# Altium PCB 智能插座2019_1_7.PcbDoc
Units mil, origin at the board's own origin, x right, y up, seen from the top; angles counter-clockwise.
Board outline 3149.61 x 3089.41 mil, 2 copper layers (Top Layer, Bottom Layer); 84 components, 61 nets, 276 pads, 96 vias.
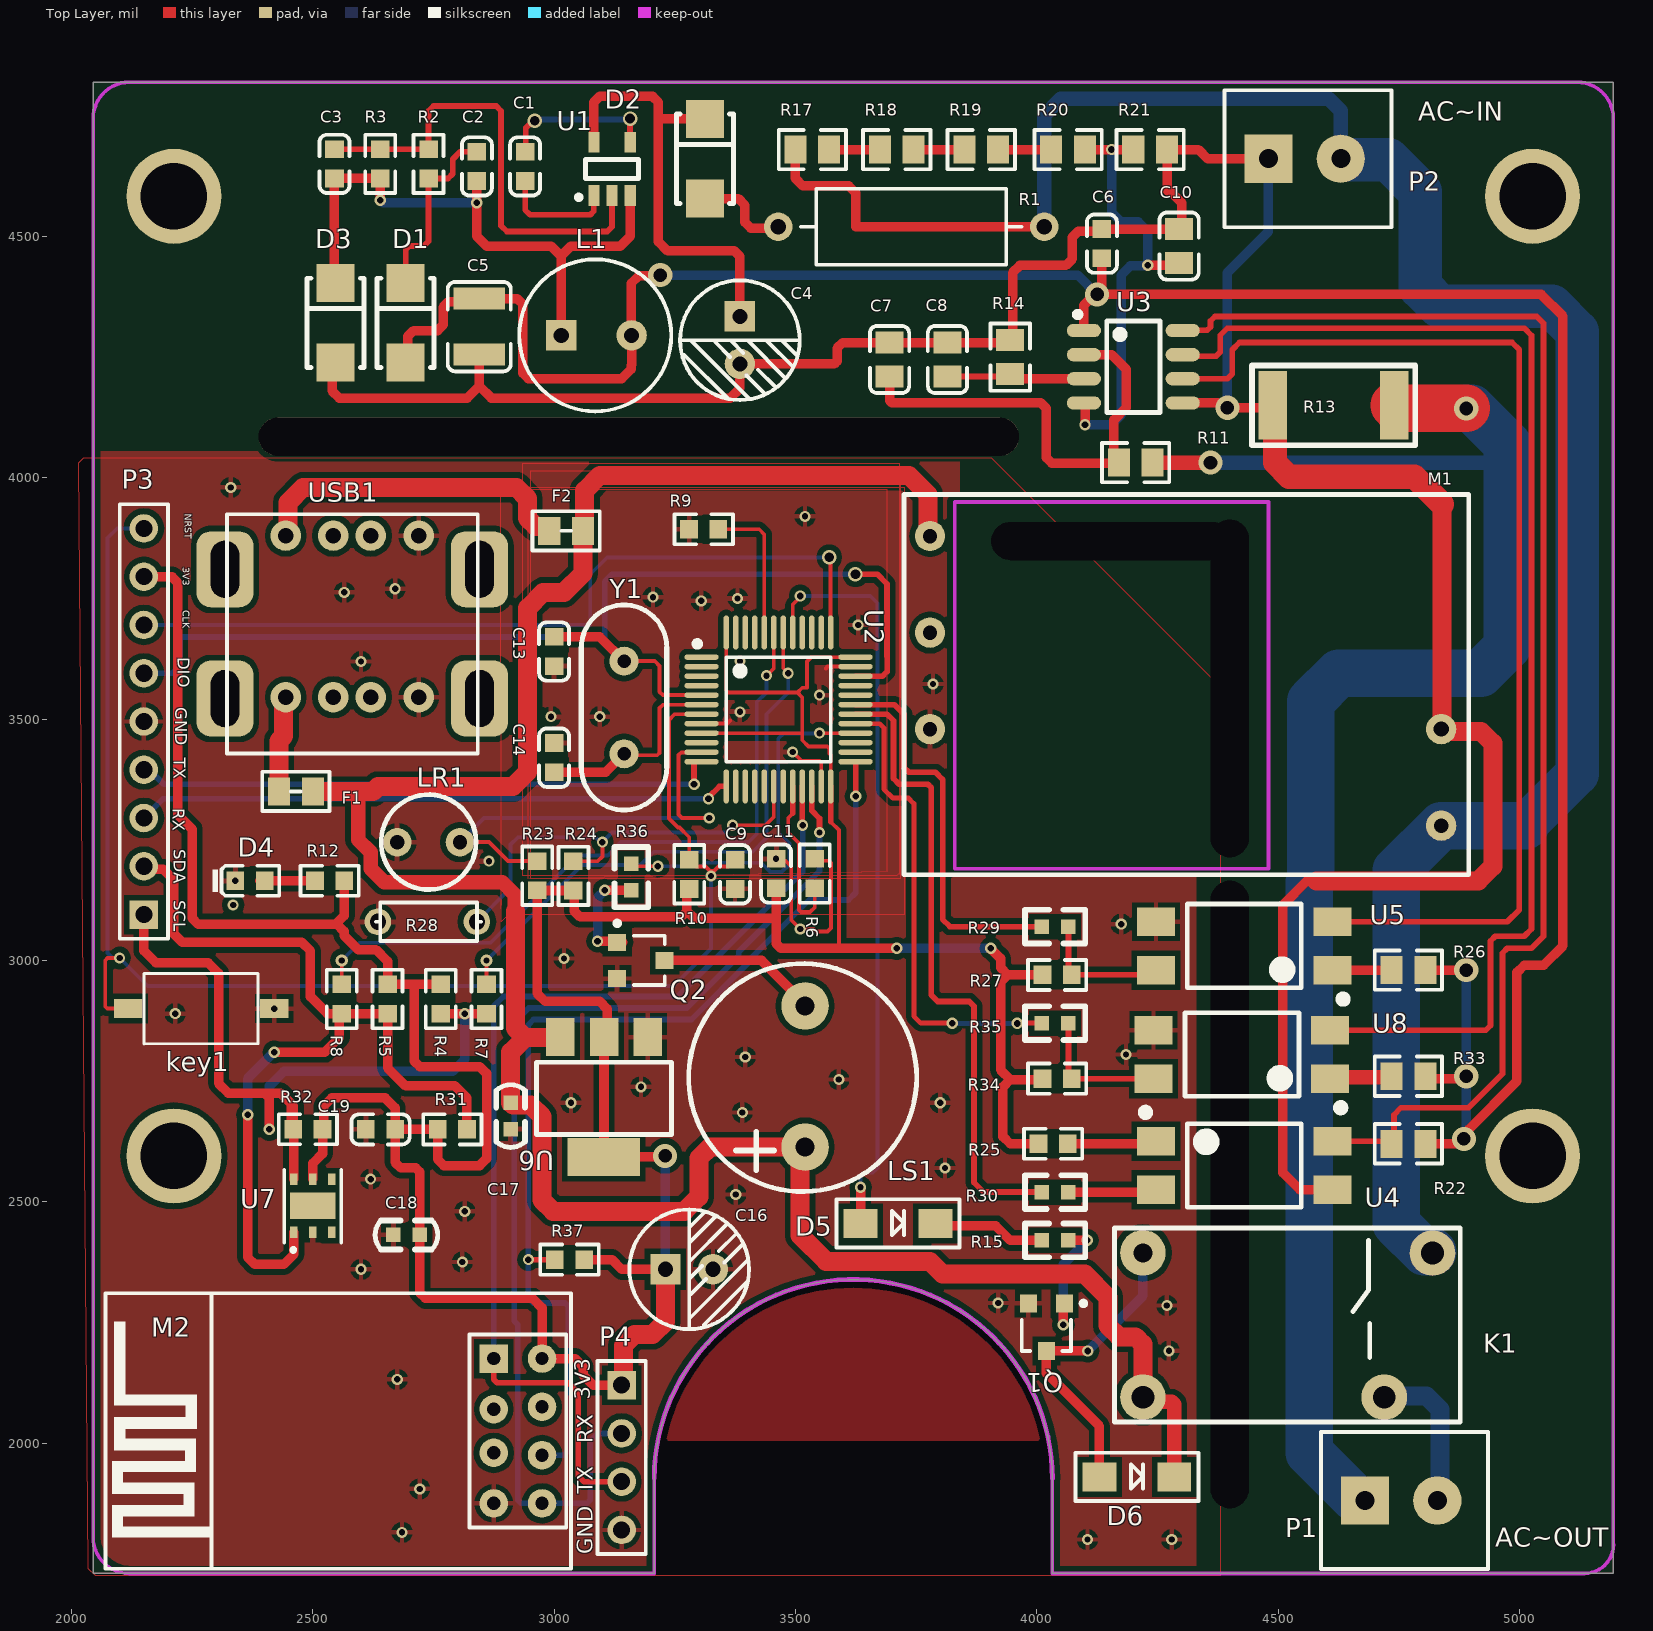
[diagram p0: Top Layer view]
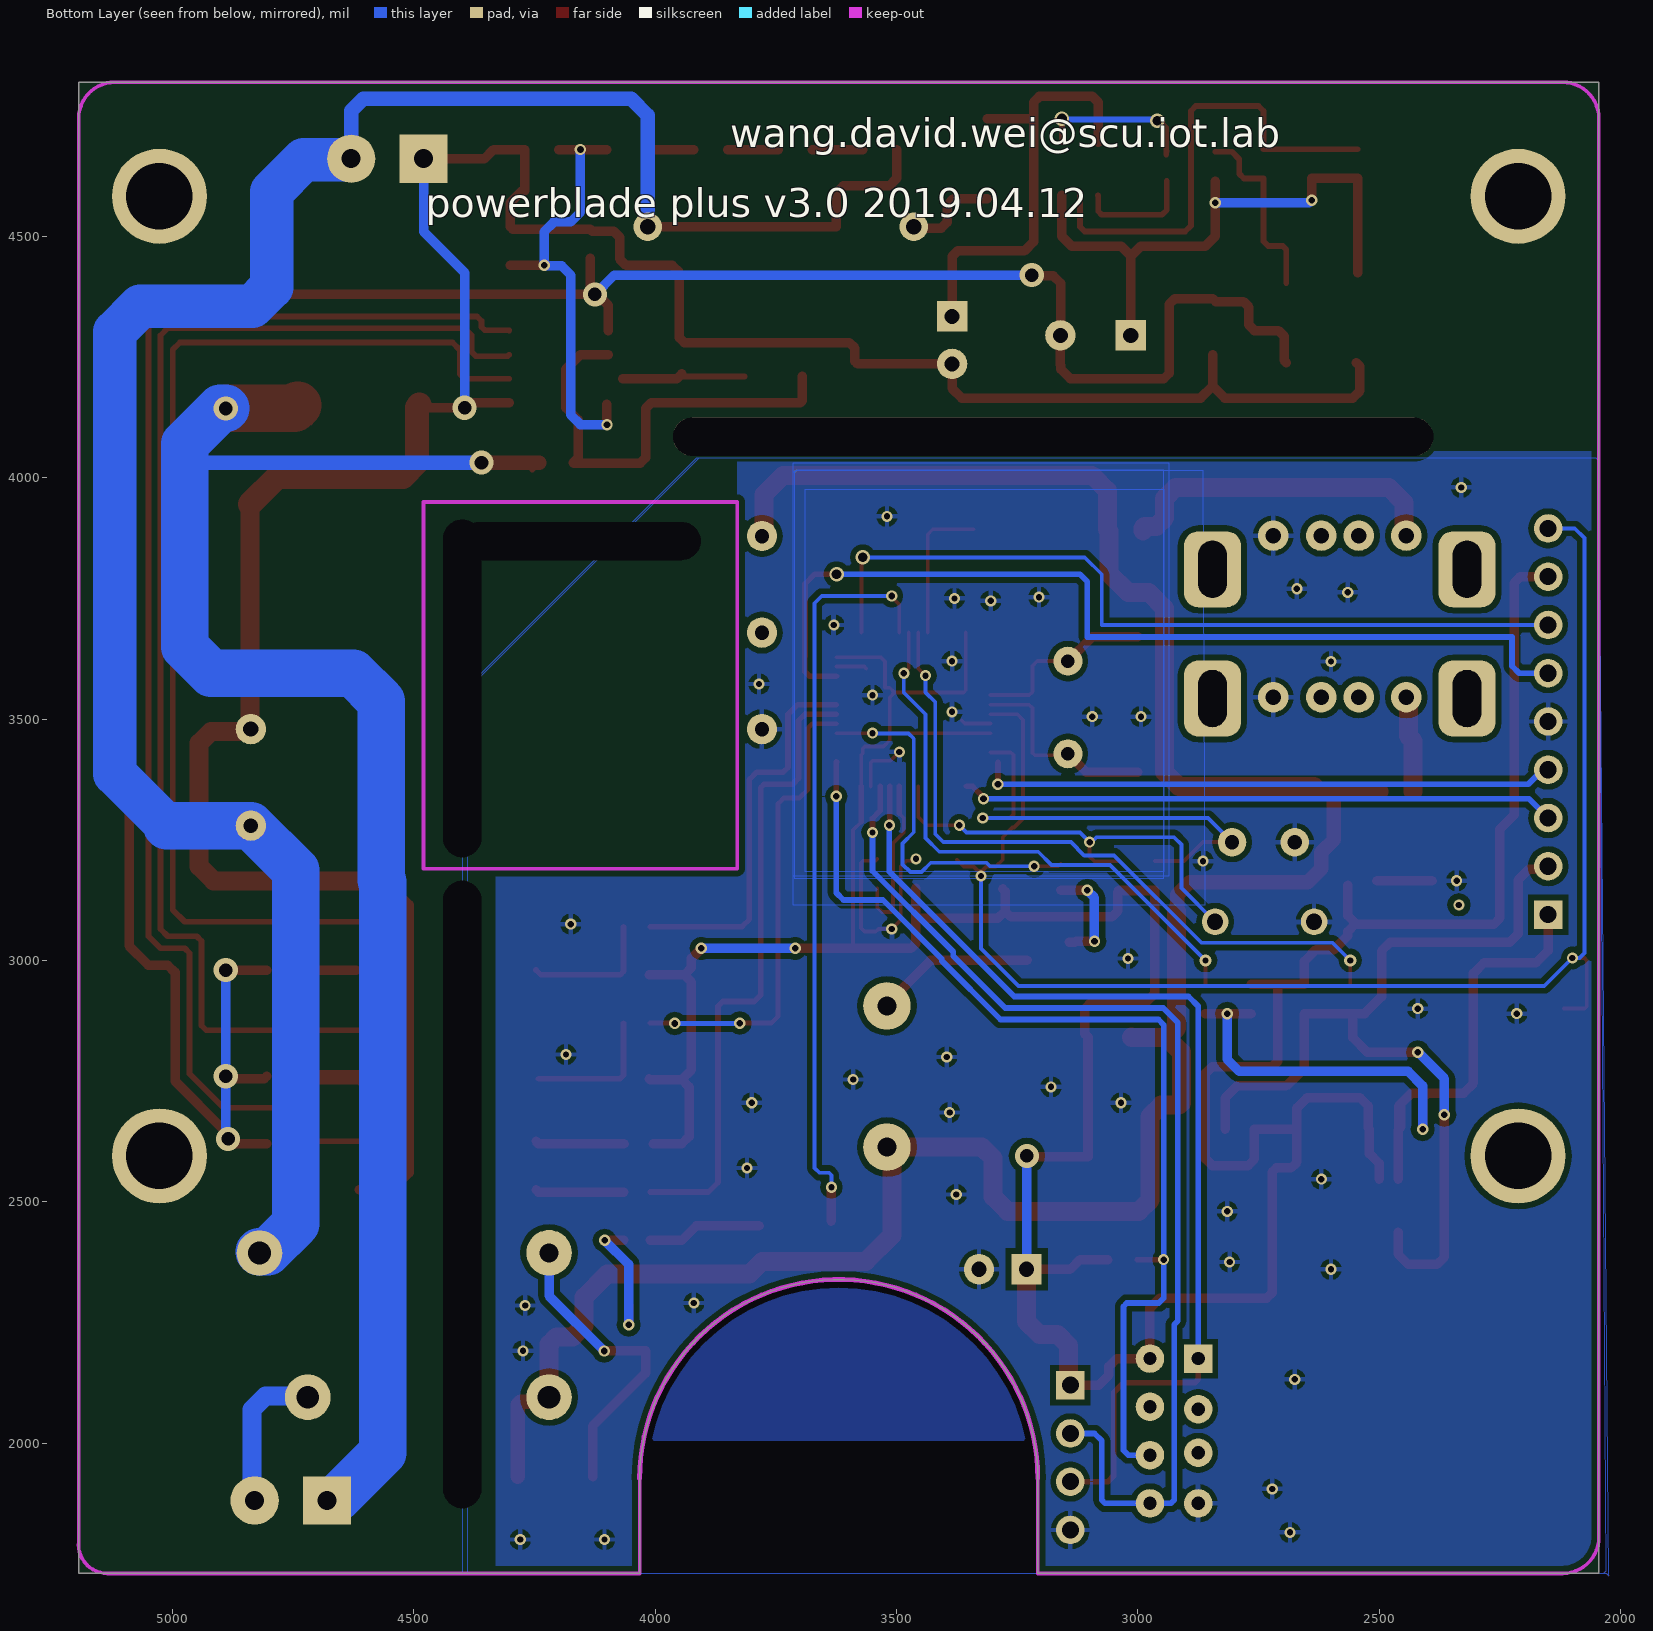
[diagram p1: Bottom Layer view, seen from below]

## Layer stack, top to bottom
Top Solder: solder mask 0.4, Solder Resist, Dk 3.5
Top Layer: signal copper 1.4
Dielectric1: dielectric 12.6, FR-4, Dk 4.8
Bottom Layer: signal copper 1.4
Bottom Solder: solder mask 0.4, Solder Resist, Dk 3.5

## Board outline
2045,1730 2045,4819.41 5194.61,4819.41 5194.61,1730 4032.32,1730 4032.32,1925.71 ccw(c3619.84,1926.42) 3207.36,1925.71 3207.36,1730.04 3207.32,1730

## Design rules (kind name [scope] priority, off if disabled: settings)
Clearance [All] p1: gap=8 ignorepadtopadclearanceinfootprint=FALSE
ComponentClearance [All] p1 off: gap=10 collisioncheckmode=3 verticalgap=10 showdistances=FALSE
FabricationTestPointUsage TestPointUsage [All] p1: valid=0 allowmultiple=FALSE
FabricationTestpoint Testpoint [All] p1: side=3 testpointundercomponent=TRUE minsize=40 maxsize=100 preferedsize=60 minholesize=0 maxholesize=40 preferedholesize=32 testpointgrid=1 allowsidetop=TRUE allowsidebottom=TRUE usegrid=TRUE gridtolerance=0.01
PolygonConnect [All] p1: connectstyle=Relief reliefconductorwidth=10 reliefentries=4 polygonreliefangle="90 Angle" airgapwidth=10
RoutingVias [All] p1 off: holewidth=28 width=50 viastyle="Through Hole" minholewidth=28 minwidth=50 maxholewidth=28 maxwidth=50
SolderMaskExpansion [All] p1: expansion=4
Width [All] p1: maxlimit=308.11 minlimit=7.87 preferedwidth=19.68
27 further rules are at their usual default settings.

## Components (designator, comment, footprint, x,y, rotation, side; value= is the part's Value field where it differs from the comment)
C1 "2.2μF/10V" LC-0603_C 2940,4645 r270 top value="100nF (104) ±10% 50V"
C2 "220nF" LC-0603_C 2840,4645 r90 top value="100nF (104) ±10% 50V"
C3 "470pF" LC-0603_C 2545,4650.32 r90 top value="100nF (104) ±10% 50V"
C4 "3.3μF/400V" CAP-ELECT-TH-6.3X7 3385,4285 r270 top value=2.2μF/400V
C5 "100μF" LC-1210_C 2845,4313.07 r90 top value="100nF (104) ±10% 50V"
C6 "0.1μF" LC-0603_C 4135,4485 r90 top value="100nF (104) ±10% 50V"
C7 "33nF" LC-0805_C 3695,4245 r90 top value="100nF (104) ±10% 50V"
C8 "33nF" LC-0805_C 3815,4245 r270 top value="100nF (104) ±10% 50V"
C9 "0.1μF" LC-0603_C 3375,3178.37 r90 top
C10 "33nF" LC-0805_C 4295,4480 r90 top value="100nF (104) ±10% 50V"
C11 "0.1μF" LC-0603_C 3460,3180 r270 top
C13 "20pF" LC-0603_C 3000,3640 r270 top
C14 "20pF" LC-0603_C 3000,3420 r90 top
C16 "1000μF/400V" CAP-ELECT-TH-6.3X7 3280,2360 r0 top value=2.2μF/400V
C17 "104" 0603C#1 2911.26,2683.39 r90 top
C18 "104" 0603C#2 2700,2430 r0 top
C19 "0.1μF" LC-0603_C 2640.43,2649.96 r0 top
D1 "1N4007" LC-SMA(DO-214AC)_S1 2700,4320 r270 top
D2 "1N4007" LC-SMA(DO-214AC)_S1 3320,4660 r270 top
D3 "US1J(600V 1A)" LC-SMA(DO-214AC)_S1 2555,4320 r270 top
D4 "POWER" LC-0603_LED_S1 2370,3165 r0 top value=红?
D5 "IN4148" 1206D#1 3585,2425 r90 top
D6 "" 1206D#2 4080,1900 r90 top
F1 "1.1A  自恢复保险丝" AFUSE 2460,3360 r180 top
F2 "1.1A  自恢复保险丝" AFUSE 3020,3900 r180 top
K1 "Relay-5V" SJ-S-105LMH 4220,2197.36 r0 top
key1 "SW" KEY-2 2420,2900 r180 top
L1 "1mH" L-10X14 3085.32,4295 r0 top
LR1 "光敏电阻" GUANGMIN 2740,3245 r180 top
LS1 "BUZZER 5V" BUZZER 3520,2760 r270 top
M1 "ACDC_THX208based" ACDC_THX208 4895,3180 r180 top
M2 "ESP-01&01S Module" "ESP-01&01S Module" 2925,2025 r90 top
P1 "Header" 3.81-2P 4680,1880 r0 top
P2 "Header" 3.81-2P 4480,4660 r0 top
P3 "Header 9" HDR1X9 2150,3095 r90 top
P4 "Header 4" HDR1X4 3140,2120 r270 top
Q1 "S8050" SOT-23 4020,2240 r180 top
Q2 "S8050" SOT-23 3180,3000 r270 top
R1 "39Ω/1W" R-1W-THT 3740,4520 r180 top
R2 "5.49KΩ" LC-0603_R 2740,4650.32 r270 top
R3 "4.99KΩ" LC-0603_R 2640,4650.31 r90 top
R4 "4.7KΩ" LC-0603_R 2765,2920 r270 top
R5 "4.7KΩ" LC-0603_R 2655,2920 r270 top
R6 "10KΩ" LC-0603_R 3540,3180 r270 top
R7 "100" LC-0603_R 2860,2920 r90 top
R8 "100" LC-0603_R 2560,2920 r90 top
R9 "10KΩ" LC-0603_R 3310,3893.15 r180 top
R10 "10KΩ" LC-0603_R 3280,3178.37 r270 top
R11 "1KΩ,1%" LC-0805_R 4205,4031.46 r0 top
R12 "1.5KΩ" LC-0603_R 2535,3165 r0 top
R13 "2mΩ/25A" R2512 4615,4150 r180 top
R14 "1KΩ,1%" LC-0805_R 3945,4250 r90 top
R15 "Res2" 0603 4065.61,2420 r180 top value=4.7K
R17 "470KΩ,1%" LC-0805_R 3535,4680 r180 top
R18 "470KΩ,1%" LC-0805_R 3710,4680 r180 top
R19 "470KΩ,1%" LC-0805_R 3885,4680 r180 top
R20 "470KΩ,1%" LC-0805_R 4065,4680 r180 top
R21 "1KΩ,1%" LC-0805_R 4235,4680 r0 top
R22 "1KΩ,1%" LC-0805_R 4770,2620 r0 top
R23 "10KΩ 1%" LC-0603_R 2965,3175.32 r270 top
R24 "10KΩ 1%" LC-0603_R 3040,3175 r270 top
R25 "2.2KΩ" LC-0603_R 4033.99,2620 r180 top
R26 "1KΩ,1%" LC-0805_R 4769.96,2980 r0 top
R27 "2.2KΩ" LC-0603_R 4042.25,2970 r180 top
R28 "MF52-10K   3950 1％" AXIAL-0.3 2740,3080 r180 top value=MF52-10K
R29 "0Ω/1W" 0603 4065.61,3070 r180 top
R30 "0Ω/1W" 0603 4010.61,2520 r0 top
R31 "10KΩ" LC-0603_R 2789.17,2649.96 r0 top
R32 "10KΩ" LC-0603_R 2490,2650 r180 top
R33 "1KΩ,1%" LC-0805_R 4769.96,2760 r0 top
R34 "2.2KΩ" LC-0603_R 4042.25,2755 r180 top
R35 "0Ω/1W" 0603 4065.61,2870 r180 top
R36 "4.7K" 0603 3160,3200 r270 top
R37 "4.7KΩ" LC-0603_R 3031.94,2380 r0 top
U1 "MP150" LC-SOT-23-5 3120,4640 r270 top
U2 "STM32F103C8T6" LC-LQFP-48_7x7x05P 3465,3520 r270 top
U3 "HLW8032" LC-SOP-8_150mil 4200,4230 r270 top
U4 "PC817" LC-SMD-4 4430,2575 r0 top
U5 "PC817" LC-SMD-4 4430,3030 r180 top
U6 "LM1117-3.3V" SOT-223/P2.3 3105,2730 r270 top
U7 "SHT1" SHT2X 2500.04,2436.5 r0 top
U8 "PC817" LC-SMD-4 4425,2805 r180 top
USB1 "2_USB" 2_USB 2600,3880 r180 top
Y1 "8M" 49/U_N 3145,3620 r270 top value="25MHz ±20ppm 20pF"

## Footprints (in the part's own frame and the unit in brackets; to place one, negate y for a bottom-side part, rotate by r counter-clockwise, add the part's x,y. Pads: shape width x height; smd on the part's side, far side on the other; paste and mask are expansions set on the pad)
2_USB [mm]
  rrect50% 3x4 hole 1.5 slot 3 at 90 deg: 0(-6.24,8.57) 0(-6.24,1.77) 0(7.16,8.57) 0(7.16,1.77)
  round 1.6 hole 0.8: 1(3.96,8.5) 2(-0.508,8.5) 3(1.46,8.5) 4(-3.04,8.5) 5(3.96,0) 6(-0.508,0) 7(1.46,0) 8(-3.04,0)
  silkscreen extent -6.14,-1.13 7.06,11.47
3.81-2P [mil]
  rect 100x100 hole 39.37: 1(0,0.99)
  round 100 hole 39.37: 2(150,1)
  silkscreen extent -91,-141 255,143
49/U_N [mil]
  round 60 hole 28: 1(0,0) 2(192,0)
  silkscreen extent -116,-88 308,89, body extent -117,-88 309,89, height 512
0603 [mil]
  rect 30x30 smd: 1(0,0) 2(55,0)
  silkscreen extent -35,-35 90,35
0603C#1 [mil]
  rect 30x30 smd mask+4: 1(21.61,1.26)
  rect 30x30 smd: 2(-33.39,1.26)
  silkscreen extent -71,-29 59,31
0603C#2 [mil]
  rect 30x30 smd: 1(21.61,1.26) 2(-33.39,1.26)
  silkscreen extent -71,-29 59,31
1206D#1 [mil]
  rect 60x70 smd: 1(30,-50) 2(30,-205)
  silkscreen extent -20,-255 80,0
1206D#2 [mil]
  rect 60x70 smd: 1(30,-50)
  rect 60x70 smd mask+4: 2(30,-205)
  silkscreen extent -20,-255 80,0
ACDC_THX208 [mm]
  round 1.6 hole 0.762: 1(1.45,-2.52) 3(28.35,-7.6) 4(28.35,-12.68)
  round 1.6 hole 0.8: 2(1.45,-7.6)
  round 1.6 hole 0.762 mask+0.102: 5(28.35,-17.76)
  silkscreen extent 0,-19.94 29.72,0.06
AFUSE [mm]
  rect 1.16x1.47 smd mask+0.102: 1(-1.017,0.254)
  rect 1.16x1.47 smd: 2(0.763,0.254)
  silkscreen extent -1.9,-0.78 1.64,1.29, body extent -1.12,-0.37 0.88,0.88, height 0.49
AXIAL-0.3 [mm] "Resistor; 2 Leads"
  round 1.4 hole 0.85: 1(-2.54,0) 2(2.667,0)
  silkscreen extent -2.77,-1.02 2.77,1.02
BUZZER [mm]
  round 2.5 hole 1 mask+0.102: 1(3.728,0)
  round 2.5 hole 1: 2(-3.703,0)
  silkscreen extent -5.93,-6.12 6.07,5.87
CAP-ELECT-TH-6.3X7 [mm]
  rect 1.6x1.6 hole 0.8: 1(-1.25,0)
  round 1.6 hole 0.8: 2(1.25,0)
  silkscreen extent -3.15,-3.15 3.15,3.15
"ESP-01&01S Module" [mm]
  rect 1.5x1.5 hole 0.7: 1(3.81,1.27)
  round 1.5 hole 0.7: 2(1.15,1.27) 3(-1.15,1.27) 4(-3.81,1.27) 5(3.81,-1.27) 6(1.27,-1.27) 7(-1.27,-1.27) 8(-3.81,-1.27)
  silkscreen extent -7.25,-2.79 7.25,21.71
GUANGMIN [mm]
  round 1.5 hole 0.75: 1(-1.651,0) 2(1.651,0)
  silkscreen extent -2.5,-2.5 2.5,2.5
HDR1X4 [mm] "Connector; Header; 4 Position"
  rect 1.5x1.5 hole 0.9: 1(0,0)
  round 1.5 hole 0.9: 2(2.54,0) 3(5.08,0) 4(7.62,0)
  silkscreen extent -1.27,-1.27 8.89,1.27
HDR1X9 [mm] "Connector; Header; 9 Position"
  rect 1.5x1.5 hole 0.9: 1(0,0)
  round 1.5 hole 0.9: 2(2.54,0) 3(5.08,0) 4(7.62,0) 5(10.16,0) 6(12.7,0) 7(15.24,0) 8(17.78,0) 9(20.32,0)
  silkscreen extent -1.27,-1.27 21.59,1.27
KEY-2 [mm]
  rect 1.5x1 smd: 1(-0.005,-0.001) 2(7.685,-0.001)
  silkscreen extent 0.85,-1.85 6.85,1.86
L-10X14 [mm]
  rect 1.6x1.6 hole 0.8: 1(-1.786,0)
  round 1.6 hole 0.8: 2(1.913,0)
  silkscreen extent -4,-4 4,4
LC-0603_C [mm]
  rect 0.93x0.98 smd: 1(-0.77,0) 2(0.77,0)
  silkscreen extent -1.54,-0.79 1.54,0.79, body extent -0.8,-0.4 0.8,0.4, height 0.3
LC-0603_LED_S1 [mm]
  rect 0.93x0.98 smd: A(0.77,0) K(-0.77,0)
  silkscreen extent -1.97,-0.79 1.53,0.79, body extent -0.8,-0.4 0.8,0.4, height 0.6
LC-0603_R [mm]
  rect 0.93x0.98 smd: 1(-0.77,0) 2(0.77,0)
  silkscreen extent -1.53,-0.79 1.54,0.79, body extent -0.85,-0.4 0.85,0.4, height 0.56
LC-0805_C [mm]
  rect 1.16x1.47 smd: 1(-0.89,0) 2(0.89,0)
  silkscreen extent -1.77,-1.04 1.77,1.04, body extent -1,-0.62 1,0.63, height 0.77
LC-0805_R [mm]
  rect 1.16x1.47 smd: 1(-0.89,0) 2(0.89,0)
  silkscreen extent -1.77,-1.03 1.77,1.04, body extent -1,-0.62 1,0.63, height 0.49
LC-1210_C [mm]
  rect 1.16x2.72 smd: 1(-1.475,0) 2(1.475,0)
  silkscreen extent -2.36,-1.66 2.35,1.66, body extent -1.6,-1.25 1.6,1.25, height 1.3
LC-LQFP-48_7x7x05P [mm]
  oval 0.28x1.8 smd: 1(-2.75,-4.05) 2(-2.25,-4.05) 3(-1.75,-4.05) 4(-1.25,-4.05) 5(-0.75,-4.05) 6(-0.25,-4.05) 7(0.25,-4.05) 8(0.75,-4.05) 9(1.25,-4.05) 10(1.75,-4.05) 11(2.25,-4.05) 12(2.75,-4.05) 25(2.75,4.05) 26(2.25,4.05) 27(1.75,4.05) 28(1.25,4.05) 29(0.75,4.05) 30(0.25,4.05) 31(-0.25,4.05) 32(-0.75,4.05) 33(-1.25,4.05) 34(-1.75,4.05) 35(-2.25,4.05) 36(-2.75,4.05)
  oval 1.8x0.28 smd: 13(4.05,-2.75) 14(4.05,-2.25) 15(4.05,-1.75) 16(4.05,-1.25) 17(4.05,-0.75) 18(4.05,-0.25) 19(4.05,0.25) 20(4.05,0.75) 21(4.05,1.25) 22(4.05,1.75) 23(4.05,2.25) 24(4.05,2.75) 37(-4.05,2.75) 38(-4.05,2.25) 39(-4.05,1.75) 40(-4.05,1.25) 41(-4.05,0.75) 42(-4.05,0.25) 43(-4.05,-0.25) 44(-4.05,-0.75) 45(-4.05,-1.25) 46(-4.05,-1.75) 47(-4.05,-2.25) 48(-4.05,-2.75)
  silkscreen extent -3.6,-4.42 2.75,2.75
LC-SMA(DO-214AC)_S1 [mm]
  rect 2x2 smd: 1(2.076,-0.194) 2(-2.124,-0.194)
  silkscreen extent -2.37,-1.69 2.33,1.31
LC-SMD-4 [mm]
  rect 2x1.5 smd: 1(-4.65,1.27) 2(-4.65,-1.27) 3(4.65,-1.27) 4(4.65,1.27)
  silkscreen extent -5.4,-2.2 3,3, body extent -5.02,-2.42 5.01,2.42, height 3.9
LC-SOP-8_150mil [mm]
  oval 0.7x1.8 smd: 1(-1.905,-2.6) 2(-0.635,-2.6) 3(0.635,-2.6) 4(1.905,-2.6) 5(1.905,2.6) 6(0.635,2.6) 7(-0.635,2.6) 8(-1.905,2.6)
  silkscreen extent -2.9,-3.07 2.4,1.4, body extent -2.5,-3.1 2.5,3.1, height 1.75
LC-SOT-23-5 [mm]
  rect 1.1x0.6 smd: 1(1.4,-0.95) 2(1.4,0) 3(1.4,0.95) 4(-1.4,0.95) 5(-1.4,-0.95)
  silkscreen extent -0.5,-1.87 1.62,1.4
R2512 [mm]
  rect 1.5x3.6 smd: 1(-3.2,0) 2(3.2,0)
  silkscreen extent -4.3,-2.1 4.3,2.1
R-1W-THT [mm]
  round 1.5 / inner oval 1.5x2 / far side round 1.5 hole 0.8: 1(-7,0)
  round 1.5 hole 0.8: 2(7,0)
  silkscreen extent -5.8,-2 5.8,2
SHT2X [mm]
  rect 2.4x1.4 smd: 0(0,1.4)
  rect 0.4x0.6 smd: 1(-1,0) 2(0,0) 3(1,0) 4(1,2.8) 5(0,2.8) 6(-1,2.8)
  silkscreen extent -1.5,-0.95 1.5,3.3
SJ-S-105LMH [mm]
  round 2.4 hole 1: 1(0,5)
  round 2.4 hole 1.2 mask+0.102: 2(0,-2.6)
  round 2.4 hole 1.2: 3(15.24,4.984) 4(12.7,-2.6)
  silkscreen extent -1.5,-3.9 16.7,6.3
SOT-23 [mm] "SOT-23; 3 Leads; Body 3.0 x 2.6 mm, inc. leads (LxW max)"
  rect 0.9x0.95 smd: 1(-0.95,-1.25) 2(0.95,-1.25) 3(0,1.25)
  silkscreen extent -2.08,-1.37 1.3,1.25
SOT-223/P2.3 [mil]
  rect 79x59 smd: 1(-111,89.1) 2(-111,-1.45)
  rect 79x150 smd: 2(137,-1.9)
  rect 79x59 smd mask+4: 3(-111,-92)
  silkscreen extent -59,-141 91,139

## Part data
C1 C2 C3 C5 C6 C7 C8 C10: library part CAP, "贴片电容"
C4 C16: library part "Cap Pol1", "直插电解电容", LatestRevisionDate=17-Jul-2002, LatestRevisionNote="Re-released for DXP Platform.", PackageReference=RB7.6-15, Published=8-Jun-2000, Publisher="Altium Limited"
C9 C11 C13 C14 C19: library part Cap, "贴片电容"
C17 C18: library part CAP, "Capacitor"
D1 D2 D3: library part "Diode 1N5408", "贴片二极管", ComponentLink1Description="Manufacturer Link", ComponentLink1URL=http://www.irf.com/, DatasheetDocument=Aug-1984, LatestRevisionDate=17-Jul-2002, LatestRevisionNote="Re-released for DXP Platform.", PackageReference=DO-201AD, Published=8-Jun-2000, Publisher="Altium Limited"
D4: library part LED1, "发光二极管"
D5 D6: library part Diode, "Default Diode", PackageDocument=Sep-1996, Code_JEDEC=DO-214-AB, LatestRevisionDate=17-Jul-2002, LatestRevisionNote="Re-released for DXP Platform.", PackageReference=SMC, Published=8-Jun-2000, Publisher="Altium Limited"
F1 F2: library part "Fuse 2", "Fuse", LatestRevisionDate=17-Jul-2002, LatestRevisionNote="Re-released for DXP Platform.", PackageReference=PIN-W2/E2.8, Published=8-Jun-2000, Publisher="Altium Limited"
K1: library part SJ-S-105LMH, "Single-Pole Dual-Throw Relay", LatestRevisionDate=17-Jul-2002, LatestRevisionNote="Re-released for DXP Platform.", PackageReference=MODULE5B, Published=24-Mar-1999, Publisher="Altium Limited"
key1: "Switch", LatestRevisionDate=17-Jul-2002, LatestRevisionNote="Re-released for DXP Platform.", PackageReference=SPST-2, Published=24-Mar-1999, Publisher="Altium Limited"
L1: library part IND_8, "直插绕线电感", AtherosDescription="IND,SMT,SHIELDING CHOKE,10uH,7.3x7.3", ATHEROS KEY=078-100LM-000, CISPartType=Inductor\Ferrite, OriginalSymbolOrigin=(0,0)
LS1: library part Bell, "Electrical Bell", LatestRevisionDate=17-Jul-2002, LatestRevisionNote="Re-released for DXP Platform.", PackageReference=PIN2, Published=24-Mar-1999, Publisher="Altium Limited"
M1: library part ACDC, "THX208Based"
P1 P2: library part "Header 2", "Header, 2-Pin", LatestRevisionDate=17-Jul-2002, LatestRevisionNote="Re-released for DXP Platform.", Publisher="Altium Limited"
P3: "Header, 9-Pin", LatestRevisionDate=17-Jul-2002, LatestRevisionNote="Re-released for DXP Platform.", Publisher="Altium Limited"
P4: "Header, 4-Pin", LatestRevisionDate=17-Jul-2002, LatestRevisionNote="Re-released for DXP Platform.", Publisher="Altium Limited"
Q1 Q2: library part NPN, "NPN Bipolar Transistor", Code_JEDEC=TO-226-AA, LatestRevisionDate=17-Jul-2002, LatestRevisionNote="Re-released for DXP Platform.", PackageReference=TO-226, Published=8-Jun-2000, Publisher="Altium Limited"
R1 R2 R3 R4 R5 R6 R7 R8 R9 R10 R11 R12 R13 R14 R17 R18 R19 R20 R21 R22 R23 R24 R25 R26 R27 R29 R30 R31 R32 R33 R34 R35: library part 电阻, "贴片电阻"
R15: "Resistor", LatestRevisionDate=17-Jul-2002, LatestRevisionNote="Re-released for DXP Platform.", PackageReference=AXIAL-0.4, Published=8-Jun-2000, Publisher="Altium Limited"
R28: library part "Res Adj2", "Variable Resistor", LatestRevisionDate=17-Jul-2002, LatestRevisionNote="Re-released for DXP Platform.", PackageReference=AXIAL-0.6, Published=8-Jun-2000, Publisher="Altium Limited", Set Position=0.5
R36: library part Res2, "Resistor", LatestRevisionDate=17-Jul-2002, LatestRevisionNote="Re-released for DXP Platform.", PackageReference=0805, Published=8-Jun-2000, Publisher="Altium Limited"
R37: library part "0805 62KΩ (6202) 1%", "贴片电阻", Package=0402, SuppliersPartNumber=C17783, ComponentLink1Description=供?, ComponentLink1URL=http://www.szlcsc.com/product/details_18471.html, Supplier=LC
U1 U3: "IC"
U2: library part STM32F103CBT6, "IC", ComponentLink1Description="Manufacturer Link", ComponentLink1URL=www.st.com/stm32, ComponentLink2Description=Datasheet, ComponentLink2URL=http://www.st.com/stonline/products/literature/ds/13587.pdf, DatasheetVersion="rev6, Mar-2008", PackageDescription="48-Pin Low-Profile Quad Flat Pack, 7 x 7 mm Body, 0.5 mm Pitch (LQFP48)", PackageReference=LQFP48, PackageVersion=Mar-2008, Published=30-May-2008, Publisher="Altium Limited", 型号=STM32
U4 U5 U8: library part PS2501L-1-F3-A, "IC"
U6: library part 1117
U7: library part SHT21
Y1: library part XTAL_1, "晶振（直插）", LatestRevisionDate=17-Jul-2002, LatestRevisionNote="Re-released for DXP Platform.", PackageReference=R38, Published=8-Jun-2000, Publisher="Altium Limited"

## Free pads (board coordinates)
  round 196.85 hole 137.8: 0(2212.32,2595) 0(2212.32,4583.19) 0(5027.28,2595) 0(5027.28,4583.19)
  oval 1574.8x78.74 hole 78.74 slot 1574.8 at 0 deg unplated paste+0: 0(3175.55,4085)
  oval 393.7x78.74 hole 78.74 slot 500 at 0 deg unplated paste+0: 0(4155.53,3868.9)
  oval 78.74x393.7 hole 78.74 slot 1300 at 90 deg unplated paste+0: 0(4400,2515)
  oval 78.74x393.7 hole 78.74 slot 700 at 90 deg unplated paste+0: 0(4400,3563.49)

## Via types
v1: diameter 23, hole 13, Top Layer to Bottom Layer, 60 vias
v2: diameter 23.62, hole 13.78, Top Layer to Bottom Layer, 21 vias
v3: diameter 50, hole 28, Top Layer to Bottom Layer, 9 vias
v4: diameter 30, hole 20, Top Layer to Bottom Layer, 4 vias
v5: diameter 25, hole 13, Top Layer to Bottom Layer, 2 vias

## Nets (pads, with @x,y where several pads share a name; then routed paths per layer and width w, separated by ;. In a path a pad name is that pad's centre, name@x,y a point inside that pad or via, vN(x,y) a via of type N, cw(c..) or ccw(c..) an arc to the next point about the centre after c; other vN are vias at no path point)
+3.3V: C11.2 C16.1 C18.1 C19.2 M2.5 P3.8 P4.1 R4.1 R5.1 R10.2 R12.2 R23.2 R24.2 R25.2 R27.2 R31.1 R32.1 R34.2 R37.2 U2.9 U2.24 U2.36 U2.48 U6.2 U7.5 | length 8123.6
  Top Layer w7.87: U2.9 3514.21,3470.79 ; U2.48 3356.73,3559.61 3361.35,3555 3504.21,3555 ; 3573.27,3286.73 3590,3270 3590,3025 ; U2.24 3573.27,3418.51 3573.08,3418.7 3573.08,3425.39 3570.04,3428.43 3570.04,3438.74 3565.43,3443.35 3526.97,3443.35 3514.21,3456.11 3514.21,3470.79 ; U2.36 3533.27,3628.27 3524.21,3619.21 3524.21,3565 3514.21,3565 3504.21,3555 ; 3504.21,3555 3514.21,3545 3514.21,3470.79
  Top Layer w11: 3573.27,3286.73 U2.24
  Top Layer w19.68: P3.8 2150.59,3794.41 2208.47,3794.41 2220,3782.88 2220,3302.01 2250,3272.01 2250,3087.54 2262.54,3075 2548.73,3075 ; U7.5 2500,2546.77 2500,2579.41 2520.31,2599.72 R32.1 2523.23,2652.92 2523.23,2698.82 2539.41,2715 2650,2715 2670.75,2694.25 C19.2 ; R12.2@2565.32,3156.18 2565.32,3092.86 2548.73,3076.27 2565,3060 2565,3051.35 2593.85,3022.5 2630.65,3022.5 2655,2998.15 R5.1 ; R5.1@2659.68,2950.32 2710,2950.32 ; C18.1 2721.61,2561.85 2713.47,2570 2682.28,2570 2670.75,2581.53 C19.2 ; 2733.15,2300 2955.16,2300 2975,2280.16 M2.5 3043.79,2175 3060,2158.79 3060,2140.94 3080.94,2120 P4.1 ; R4.1 2710,2950.32 ; R24.2 3042.25,3142.43 3042.25,3101.53 3053.79,3090 3263.47,3090 3275,3101.53 ; R37.2 3120,2380 3140,2360 C16.1 ; U6.2@3103.55,2593.45 3103.1,2593 3228,2593 v3(3230,2595) ; R10.2 3275,3143.06 3275,3101.53 ; C11.2 3460,3087.54 ; v2(3710,3025) 3590,3025 3470,3025 3460,3035 3460,3087.54 ; v2(3905,3025) 3905,3023.93 3925,3003.93 3925,2985 3940,2970 ; R25.2 3945,2620 3930,2635 3930,2738.07 3945,2753.07 ; R34.2 4010,2753.07 3945,2753.07 ; R27.2 3940,2970 ; C19.2 R31.1 2758.86,2587.67 2771.53,2575 2845.59,2575 2860,2589.41 2860,2765.67 2845.67,2780 2721.53,2780 2710,2791.53 2710,2950.32 ; 3275,3101.53 3276.01,3101.53 3290,3087.54 3460,3087.54 ; 3940,2970 3925,2955 3925,2773.07 3945,2753.07
  Top Layer w20: C18.1 2721.61,2311.53 2733.15,2300 ; R24.2 3039.84,3144.84 2965.16,3144.84 R23.2 2965,2931.72 2981.72,2915 3094.68,2915 3110,2899.68 3110,2847.45 3103.55,2841 U6.2@3103.55,2593.45
  Top Layer w39.37: P4.1 3143.58,2123.58 3143.58,2201.94 3166.65,2225 3204.21,2225 3230.79,2251.58 C16.1
  Bottom Layer w19.68: v3(3230,2595) 3230.79,2594.21 C16.1 ; v2(3710,3025) v2(3905,3025)
+5V: C17.1 D6.2 F1.1 F2.1 K1.2 LS1.1 M1.5 U6.3 | length 5209.9
  Top Layer w30: 2590,3350 2593.85,3346.15 2593.85,3250 2620,3223.85 2620,3190 2648.06,3161.94 2893.06,3161.94 2918.71,3136.29 2918.71,3115.51 2920,3114.22 2920,3102.63 ; K1.2@4220,2097.64 4232.34,2085.3 4279.77,2085.3 4285,2080.06 D6.2
  Top Layer w39.37: F1.1 2590,3350 2625,3350 2635,3360 2914.45,3360 2945,3390.55 2945,3730 2977.5,3762.5 3020.53,3762.5 3060.04,3802.01 F2.1 3063.19,3893.15 3063.19,3973.19 3095,4005 3735,4005 3774.34,3965.66 3774.34,3883.73 M1.5 ; 2920,3102.63 2920,2859.81 2940,2839.81 ; U6.3 3013,2839.81 2940,2839.81 ; K1.2@4220,2097.64 4220,2205 4205,2220 4170.56,2220 4147.5,2243.06 4147.5,2302.5 4100,2350 3805,2350 3778.45,2376.55 3563.45,2376.55 3510,2430 3510,2603.22 3500,2613.22 3323.06,2613.22 3300,2590.16 3300,2510 3270,2480 2998.06,2480 2975,2503.06 2975,2676.94 2951.94,2700 2915,2700 C17.1 2910,2809.81 2940,2839.81
A+5V: C5.2 C6.1 D1.1 L1.2 R22.2 R26.2 R33.2 U3.1 | length 5446.4
  Top Layer w19.68: D1.1 2697.2,4243.11 2697.2,4293.47 2708.73,4305 2758.47,4305 2770,4316.53 2770,4353.47 2781.53,4365 2838.86,4365 C5.2 2923.47,4371.14 2935,4359.61 2935,4216.53 2946.53,4205 3140,4205 3160,4225 3160,4233.35 3160.63,4233.98 L1.2 ; L1.2@3160,4305 3160,4403 3175.55,4418.55 3218.55,4418.55 v3(3220,4420) ; U3.1 4097.64,4357.64 v3@4122.5,4382.5 ; v3(4125,4380) 5045,4380 5090,4335 5090,3030 5050,2990 5010,2990 4995,2975 4995,2750 4895,2650 4895,2648.2 4885,2638.2 v3(4885,2630) 4875,2620 R22.2 ; v3@4135,4395 C6.1 ; R33.2 4810,2755 4885,2755 v3(4890,2760) ; R26.2 v3(4890,2980)
  Bottom Layer w19.68: v3(3220,4420) 4085,4420 v3(4125,4380) ; v3(4885,2630) 4890,2635 v3(4890,2760) v3(4890,2980)
AC220V-L: K1.3 M1.1 P2.2 R1.1 R17.2 | length 4585.5
  Top Layer w19.68: R17.2 3499.96,4620.04 3515,4605 3610,4605 3625,4590 3625,4520 R1.1
  Bottom Layer w30: R1.1 4015.59,4750.59 4050,4785 4605,4785 4630,4760 P2.2
  Bottom Layer w90: P2.2 4631.91,4659.09 4728.19,4659.09 4795,4592.28 4795,4395 4835,4355 5067.28,4355 5120,4302.28 5120,3386.97 5012.25,3279.21
  Bottom Layer w98.43: K1.3@4820,2396.22 4802.66,2396.22 4745,2453.88 4745,3186.3 M1.1 5012.25,3279.21
AC220V-N: C4.2 C5.1 C6.2 C7.2 C8.1 C10.2 D3.1 M1.2 P2.1 R13.2 R14.2 R21.2 U3.5 U4.3 | length 5834.3
  Top Layer w19.68: D3.1 2540,4230.91 2540,4180 2555,4165 2820,4165 2845,4190 ; C5.1 2845,4190 ; R21.2 4270,4595 4275,4595 4300,4570 4300,4520.04 C10.2 4294.73,4515.31 C6.2 4130.87,4511.18 4086.18,4511.18 4073.78,4498.78 4073.78,4453.46 4060.32,4440 3965,4440 3950,4425 3950,4290.04 3940,4280.04 C8.1 C7.2 3598.01,4280.04 3586.48,4268.51 3586.48,4241.48 3580.78,4235.78 C4.2 3385,4185 3365,4165 2870,4165 2845,4190 ; R21.2 4335,4680 4354.01,4660.99 P2.1 ; U3.5 4375,4155 4385,4145 v3(4395,4145) 4484.02,4145 R13.2 R13.2@4490,4150.98 ; 4580,3165 4560,3165 4510,3115 4510,2560 4545,2525 U4.3
  Top Layer w39.37: 4580,3165 4915,3165 4945,3195 4945,3450 4920.31,3474.69 4842.43,3474.69 M1.2 ; M1.2@4840,3480 4840,3945
  Top Layer w50: R13.2 4493.54,4145.47 4493.54,4031.46 4522.83,4002.17 4782.83,4002.17 4840,3945 ; R13.2@4489.02,4151.97 R13.2@4490,4150.98
  Bottom Layer w19.68: v3(4395,4145) 4395,4425 4480,4510 P2.1
ADC_IN1: LR1.1 R23.1 U2.11 | length 953.6
  Top Layer w7.87: LR1.1 2865,3245 2904.37,3205.63 R23.1 ; U2.11 3304.95,3430.82 3263.3,3430.82 3257.87,3425.39 3257.87,3302.13 3265,3295 v1(3321.53,3295)
  Bottom Layer w7.87: LR1.1 2855,3295 v1(3321.53,3295)
ADC_IN8: R24.1 R28.1 U2.18 | length 923.5
  Top Layer w7.87: R24.1 3090,3205.31 3100,3215.32 v1(3100,3245) ; v1(3370,3280) 3438.27,3280 3455.16,3296.89 U2.18
  Bottom Layer w7.87: R28.1 2910,3150 2910,3240 2925,3255 3085.91,3255 3095.91,3245 v1(3100,3245) 3120,3265 3355,3265 v1(3370,3280)
BOOT0: R9.1 U2.44 | length 302.7
  Top Layer w7.87: R9.1 3425,3893.15 3435.47,3882.67 U2.44
CTL_PIN: D5.1 U2.41 | length 1554.4
  Top Layer w7.87: U2.41 3494.53,3737.06 3510,3752.54 v2(3510,3755)
  Top Layer w19.68: D5.1@3635,2460 v1(3635,2530)
  Bottom Layer w7.87: v2(3510,3755) 3655,3755 3670,3740 3670,2570 3660,2560 3640,2560 3635,2555 3635,2553.63 ; v1(3635,2530) 3635,2553.62
DGND: C9.1 C11.1 C13.2 C14.2 C16.2 C17.2 C18.2 C19.1 D4.K key1.1 LR1.2 M1.3 M2.4 P3.5 P4.4 Q1.2 Q2.2 R6.1 R9.2 R28.2 U2.8 U2.23 U2.35 U2.47 U5.3 U6.1 U7.2 U8.3 USB1.4 USB1.8 | length 659.9
  Top Layer w8: U2.8 3358.17,3490.47 3365,3497.31 ; v1(3460,3210.32) 3463.83,3206.49 3479.34,3206.49 3491.29,3194.54 3491.29,3083.71 v1(3510,3065) 3537.57,3065 3543.07,3059.5 3566.58,3059.5 3574.06,3066.99 3574.06,3201.8 3569.38,3206.49 3543.82,3206.49 R6.1 ; v1(3494.27,3431.74) 3512.43,3413.58 3550,3413.58 3553.58,3410 U2.23 ; 3562.99,3605 3566.58,3608.58 U2.35
  other v1: 4105,1800 4279.77,1800 2685,1815 2721.61,1905 2675,2131.92 4274.07,2191 4269.5,2285 3920,2290 2600,2360 2810,2375 2815,2480 3376.42,2515 2620,2546.73 3810,2570 3390,2685 3035,2705 3800,2705 3180,2738.07 3590,2753.07 3396.1,2800 4185,2805 2215,2889.69 2420.19,2900.03 3020.53,3003.93 4175,3075 2339.68,3165 2865,3205.63 2993.74,3505 3094.68,3505 3385,3515 3550,3549.53 3785,3572.48 2600,3619.21 3385,3620 3630,3695 3304.95,3745 3380,3750 3205,3752.54 2565.32,3762.5 2670.75,3770 3520,3920 2330,3980
I2C1_SCL: P3.1 R4.2 R7.1 R32.2 U7.6 | length 1647.3
  Top Layer w19.68: P3.1 2150,3020 2175,2995 2283.15,2995 2305,2973.15 2305,2745 2325,2725 2400,2725 ; v2(2410,2650) 2410,2715 2400,2725 ; U7.6 2460.18,2547.23 2460.18,2649.51 2455,2654.68 2455,2703.5 ; R32.2@2460.63,2649.05 R32.2 2459.68,2698.82 2455,2703.5 ; R4.2 v2(2815,2889.69) R7.1 ; 2400,2725 2433.5,2725 2455,2703.5
  Bottom Layer w19.68: v2(2410,2650) 2410,2740 2440,2770 2790,2770 2815,2795 v2(2815,2889.69)
I2C1_SDA: P3.2 R5.2 R8.1 R31.2 U7.1 | length 1921.4
  Top Layer w19.68: P3.2 2156.53,3188.47 2190.59,3188.47 2212.32,3166.73 2212.32,3055 2229.92,3037.4 2477.6,3037.4 2495,3020 2495,2925 2530.31,2889.69 R8.1@2555,2889.69 ; v2(2365,2680) 2365,2385 2380,2370 2440,2370 2460.67,2390.67 U7.1 ; v2(2420,2810) 2525,2810 2555,2840 R8.1@2555,2889.69 ; R31.2 2819.49,2715 2794.49,2740 2692.36,2740 2655,2777.36 R5.2 R8.1 R8.1@2555,2889.69
  Bottom Layer w19.68: v2(2365,2680) 2365,2755 v2(2420,2810)
L_OUT: K1.4 P1.2 | length 332.4
  Bottom Layer w39.37: K1.4@4730.55,2087.09 4720,2097.64 4807.36,2097.64 4835,2070 4835,1886 P1.2
NetC1_1: C1.1 U1.4 | length 329.5
  Top Layer w11.81: C1.1@2940,4676.9 C1.1@2940.79,4676.11 ; C1.1@2941.58,4669.53 2941.58,4725 2956.58,4740 v4(2960,4740) ; U1.4 v4(3157.4,4744.21)
  Bottom Layer w11.81: v4(2960,4740) 2962.11,4742.11 3155.3,4742.11 v4(3157.4,4744.21)
NetC1_2: C1.2 U1.1 | length 241.9
  Top Layer w11.81: C1.2 2940,4555 2950,4545 3075,4545 3081.92,4551.92 3081.92,4584.2 U1.1
NetC2_1: C2.1 C3.1 D3.2 L1.1 R3.1 U1.3 | length 1242
  Top Layer w19.68: D3.2@2545,4425 C3.1 R3.1 v2(2640,4575) ; C2.1 v2(2840,4570) 2840,4500 2860,4480 2993.74,4480 3014.37,4459.37 ; L1.1@3014.37,4305 3014.37,4459.37 ; U1.3 3157.4,4500.16 3137.24,4480 3035,4480 3014.37,4459.37
  Bottom Layer w19.68: v2(2640,4575) 2645,4570 v2(2840,4570)
NetC2_2: C2.2 D1.2 R2.2 | length 394.2
  Top Layer w11.81: D1.2 2692.36,4472.36 2700,4480 2730,4480 2740,4490 R2.2 2780,4620 2790,4630 2790,4660 2805.31,4675.31 C2.2
NetC3_2: C3.2 R2.1 R3.2 U1.2 | length 974.6
  Top Layer w11.81: C3.2 R3.2 R2.1 2740,4760 2750,4770 2880,4770 2890,4760 2890,4522.12 2902.12,4510 3110,4510 3120,4520 U1.2
NetC4_1: C4.1 D2.2 U1.5 | length 918.3
  Top Layer w19.68: U1.5 3082.68,4695.2 3082.68,4778.47 3094.21,4790 3204.26,4790 3215.79,4778.47 3215.79,4744.21 ; D2.2 3311.77,4744.21 3215.79,4744.21 ; C4.1 3385,4458.47 3373.47,4470 3235,4470 3215.79,4489.21 3215.79,4744.21
NetC7_1: C7.1 R11.1 U3.2 | length 946.9
  Top Layer w19.68: C7.1 3695,4160 3700,4155 4008.47,4155 4020,4143.47 4020,4041.53 4031.53,4030 4168.5,4030 R11.1 4160,4041.42 4160,4120 4185,4145 4185,4225 4155,4255 U3.2
NetC8_2: C8.2 R14.1 U3.3 | length 251.8
  Top Layer w11.81: C8.2 R14.1@3940,4209.96
  Top Layer w19.68: R14.1 3954.96,4205 U3.3@4067.64,4205
NetC10_1: C10.1 R20.1 R21.1 U3.4 | length 940.7
  Top Layer w19.68: v2(4100,4110) U3.4@4100,4152.64 ; R20.1 R21.1 ; v2(4230,4440) C10.1@4300,4440
  Bottom Layer w19.68: v2(4100,4110) 4155,4110 4175,4130 4175,4420 4194.25,4439.25 4229.25,4439.25 v2(4230,4440) 4230,4510 4210,4530 4175,4530 4155,4550 v2(4155,4680)
NetD2_1: D2.1 R1.2 | length 199.3
  Top Layer w19.68: D2.1 3381.73,4578.27 3395,4565 3395,4529.59 3407.47,4517.12 3461.53,4517.12 R1.2
NetD4_A: D4.A R12.1 | length 114.7
  Top Layer w19.68: D4.A@2390,3165 R12.1
NetD5_2: D5.2 R15.2 | length 238
  Top Layer w19.68: D5.2@3785,2450 3915,2450 3945,2420 R15.2
NetD6_1: D6.1 K1.1 Q1.3 | length 645.5
  Top Layer w19.68: v2(4105.79,2190.79) Q1.3 4020,2145 4130,2035 D6.1
  Bottom Layer w19.68: v2(4105.79,2190.79) 4220,2305 K1.1@4220,2396.85
NetF1_2: F1.2 USB1.1 | length 201.2
  Top Layer w39.37: F1.2 2429.96,3455 2439.57,3464.61 2439.57,3540.83 USB1.1
NetF2_2: F2.2 USB1.5 | length 689.5
  Top Layer w39.37: USB1.5 2448.61,3884.52 2448.61,3948.61 2480,3980 2921.92,3980 2944.98,3956.94 2944.98,3916.21 2961.94,3899.25 2986.81,3899.25 2989.96,3896.1 F2.2
NetLS1_2: LS1.2 Q2.3 | length 343.1
  Top Layer w19.68: Q2.3 3430,3000 3520,2910 LS1.2@3520,2895
NetP1_1: P1.1 R11.2 R13.1 | length 3564.7
  Top Layer w11.81: R11.2 R11.2@4255.04,4016.46
  Top Layer w30: R11.2 v3(4360,4031.46)
  Top Layer w98.43: R13.1 4747.52,4143.47 v3(4890,4143.47)
  Bottom Layer w30: v3(4360,4031.46) 4948.54,4031.46
  Bottom Layer w98.43: P1.1@4660.91,1884.09 4565,1980 4565,3162.76 4568.15,3165.91 4568.15,3537.34 4625.81,3595 4920,3595 4975,3650 4975,4070 4901.53,4143.47 v3(4890,4143.47)
NetQ1_1: Q1.1 R15.1 | length 276.9
  Top Layer w19.68: v2(4055,2245) Q1.1@4055,2286.81 ; R15.1 v2(4105,2420)
  Bottom Layer w19.68: v2(4055,2245) 4055,2370 v2(4105,2420)
NetQ2_1: Q2.1 R36.2 | length 216
  Top Layer w19.68: v2(3090,3040) Q2.1@3128.19,3040 ; v2(3105,3145) R36.2 ; Q2.1 Q2.1@3142.4,3037.4
  Bottom Layer w19.68: v2(3090,3040) 3090,3130 v2(3105,3145)
NetR6_2: R6.2 U2.20 | length 347.8
  Top Layer w7.87: 3494.53,3304.53 3485,3295 3485,3265 3507.23,3242.77 3507.23,3104.61 3511.84,3100 3530.39,3100 3540,3109.61 R6.2
  Top Layer w11: 3494.53,3304.53 U2.20
NetR17_1: R17.1 R18.2 | length 104.9
  Top Layer w19.68: R17.1 R18.2
NetR18_1: R18.1 R19.2 | length 104.9
  Top Layer w19.68: R18.1 R19.2
NetR19_1: R19.1 R20.2 | length 100
  Top Layer w19.68: R19.1 R20.2@4020,4680
NetR25_1: R25.1 U4.1 | length 184.7
  Top Layer w19.68: R25.1 4241.93,2620 U4.1
NetR26_1: R26.1 U5.1 | length 114.9
  Top Layer w19.68: U5.1@4620,2980 R26.1
NetR27_1: R27.1 R29.1 U5.4 | length 281.4
  Top Layer w11.81: R29.1 4065.61,2976.95 R27.1 4236.93,2970 U5.4
NetR30_2: R30.2 U4.2 | length 183.4
  Top Layer w19.68: R30.2 4241.93,2520 U4.2
NetR33_1: R33.1 U8.1 | length 136
  Top Layer w30: U8.1 4610.57,2757.5 4732.42,2757.5 R33.1 4734.92,2759.92 R33.1@4730,2755
NetR34_1: R34.1 R35.1 U8.4 | length 287.2
  Top Layer w11.81: R35.1 4065.61,2761.95 R34.1 U8.4
NRST: C9.2 key1.2 P3.9 R10.1 U2.7 | length 3076.3
  Top Layer w7.87: v1(2100,3005) 2075,3005 2070,3000 2070,2904.64 2074.61,2900.03 key1.2 ; U2.7 3250.16,3510.16 3238.19,3498.19 3238.19,3293.97 3256.85,3275.32 3259.68,3275.32 3280,3255 R10.1 3294.37,3194.32 3313.5,3194.32 3322.82,3185 3331.01,3185 3340.32,3194.32 3360.63,3194.32 C9.2
  Bottom Layer w7.87: P3.9 2095,3895 2075,3875 2075,3015 2085,3005 v1(2100,3005) 2158.16,2946.84 3247.28,2946.84 3325,3024.56 v1(3325,3175)
OSC_IN: C13.1 U2.5 Y1.1 | length 387.2
  Top Layer w8: Y1.1 3208.55,3620 3218.55,3610 3218.55,3556.46 3225.43,3549.59 ; 3225.43,3549.53 3305.38,3549.53 3305.55,3549.7 U2.5
  Top Layer w19.68: C13.1 3094.68,3670.32 Y1.1
OSC_OUT: C14.1 U2.6 Y1.2 | length 420.5
  Top Layer w7.87: 3225.43,3529.84 U2.6
  Top Layer w8: Y1.2 3148,3425 3213.75,3425 3218.44,3429.69 3218.44,3522.73 3225.43,3529.72
  Top Layer w19.68: C14.1 3106.69,3389.68 Y1.2
PF: U3.7 U8.2 | length 2611.1
  Top Layer w11.81: U3.7 4305.38,4251.99 4371.99,4251.99 4380,4260 4380,4295 4395,4310 5010,4310 5025,4295 5025,3065 5010,3050 4950,3050 4940,3040 4940,2865 4930,2855 U8.2
PF_MCU: R35.2 U2.29 | length 975.9
  Top Layer w10: U2.29 3674.53,3490.47 3683.35,3481.65 3683.35,3355 3701.85,3336.49 3733.98,3336.49 3745.47,3325 3745.47,2884.53 3760,2870 v2(3825,2870) ; v2(3959.38,2869.38) 3960,2870 R35.2
  Bottom Layer w10: v2(3825,2870) 3825.62,2869.38 v2(3959.38,2869.38)
RX: R22.1 U3.8 U4.4 | length 2834.6
  Top Layer w11.81: U3.8 4302.87,4305.51 4353.08,4305.51 4360,4312.43 4360,4325 4369.21,4334.21 5035.79,4334.21 5050,4320 5050,3050 5025,3025 4975,3025 4965,3015 4965,2765 4895,2695 4755,2695 4740,2680 4740,2625.04 4739.96,2625 U4.4
SCL1: R7.2 U2.42 | length 1183.4
  Top Layer w7.87: R7.2 2860,2998.15 v5(2860,3000) ; U2.42 3474.84,3605.16 v1(3485,3595)
  Bottom Layer w7.87: v5(2860,3000) 3057.69,3197.69 3178.89,3197.69 3206.45,3225.25 3411.67,3225.25 3440,3253.58 3440,3510 3485,3555 v1(3485,3595)
SDA1: R8.2 U2.43 | length 1450.4
  Top Layer w7.87: R8.2 v5(2560,3000) ; v1(3440,3590) 3455,3605 3455,3679.29 U2.43
  Bottom Layer w7.87: v5(2560,3000) 2596.5,3036.5 2868.4,3036.5 3049.46,3217.56 3111.36,3217.56 3138.93,3245.13 3403.44,3245.13 3420,3261.69 3420,3535.39 3440,3555.39 v1(3440,3590)
SPK: R36.1 U2.28 | length 771.8
  Top Layer w7.87: R36.1 3165,3195 v1(3215,3195) ; v1(3550,3470.79) U2.28
  Bottom Layer w7.87: v1(3215,3195) 3306.2,3195 3313.64,3202.44 3429.08,3202.44 3448.64,3182.88 3471.36,3182.88 3487.44,3198.95 3487.44,3242.44 3464.41,3265.46 3464.41,3459.41 3475,3470 v1@3540,3470
SWCLK: P3.7 U2.37 | length 1696.4
  Top Layer w7.87: v4(3570.04,3835) 3572.67,3832.37 3572.67,3680.05 U2.37
  Bottom Layer w7.87: P3.7 3075,3695 3075,3800 3110,3835 v4(3570.04,3835)
SWDIO: P3.6 U2.34 | length 1986.9
  Top Layer w11.81: U2.34 3680.63,3588.9 3690,3598.27 3690,3629.84 3689.84,3630 3689.84,3780 3669.84,3800 v4(3624.45,3800)
  Bottom Layer w11.81: P3.6 2210,3595 2225.11,3610.11 2225,3610.22 2225,3670 3105,3670 3105,3785 3120,3800 v4(3624.45,3800)
TX: U3.6 U5.2 | length 2321.5
  Top Layer w11.81: U3.6 4395.04,4205 4405,4214.96 4405,4265 4420,4280 4985,4280 5000,4265 5000,3105 4975,3080 U5.2
USART1_RX: R29.2 U2.31 | length 811.1
  Top Layer w11: U2.31 3705.16,3529.84
  Top Layer w11.81: 3705.16,3529.84 3725,3510 3725,3399.68 3735,3389.68 3790.32,3389.68 3805,3375 3805,3085 3820,3070 R29.2
USART1_TX: R30.1 U2.30 | length 1331.9
  Top Layer w11: U2.30 3689.84,3510.16
  Top Layer w11.81: 3689.84,3510.16 3703.19,3496.81 3703.19,3376.81 3715,3365 3774.27,3365 3781.19,3358.08 3781.19,2928.81 3795,2915 3860,2915 3870,2905 3870,2540 3890,2520 R30.1
USART2_RX: P3.3 U2.13 | length 1234
  Top Layer w11.81: v2(3320,3335) 3320,3338.09 3342.47,3360.55 U2.13@3355,3360.55
  Bottom Layer w11.81: P3.3 2190,3335 v2(3320,3335)
USART2_TX: P3.4 U2.12 | length 1197.4
  Top Layer w11.81: v2(3290,3365) U2.12@3290,3410
  Bottom Layer w11.81: P3.4 2161.33,3395 2191.33,3365 v2(3290,3365)
USART3_RX: M2.8 P4.2 U2.22 | length 2292.4
  Top Layer w11: 3533.9,3310 U2.22
  Top Layer w11.81: 3534.03,3310 3534.22,3310 3550,3294.22 v1(3550,3265)
  Bottom Layer w11.81: P4.2 3090,2020 3075,2005 3075,1881.92 3068.08,1875 M2.8 2931.92,1875 2925,1881.92 2925,2245 2917.33,2252.67 2917.33,2871 2947.52,2901.19 3274.86,2901.19 3382.76,3009.09 3382.76,3017.76 3550,3185 v1(3550,3265)
USART3_TX: M2.1 P4.3 U2.21 | length 2159.7
  Top Layer w11: v1@3514.21,3280.79 U2.21
  Top Layer w11.81: M2.1 2875,2131.92 2881.92,2125 3030,2125 3050,2105 3050,1932.25 3062.25,1920 P4.3 ; v1@3514.21,3280.79 v1(3515,3280)
  Bottom Layer w11.81: M2.1 2875,2905 2895,2925 3256.33,2925 3515,3183.67 v1(3515,3280)
WIFI_EN: M2.7 R37.1 U2.25 | length 2134.9
  Top Layer w11.81: v1(2946.73,2380) R37.1 ; U2.25 3624.61,3411.73 3625,3411.34 v1(3625,3340)
  Bottom Layer w11.81: M2.7 3020,1975 3030,1985 3030,2283.08 3023.08,2290 2956.73,2290 2946.73,2300 v1(2946.73,2380) 2946.73,2866.73 2957.38,2877.38 3284.73,2877.38 3406.57,2999.22 3406.57,3003.16 3528.41,3125 3610,3125 3625,3140 v1(3625,3340)
pads on no net: M1.4 M2.2 M2.3 M2.6 U2.1 U2.2 U2.3 U2.4 U2.10 U2.14 U2.15 U2.16 U2.17 U2.19 U2.26 U2.27 U2.32 U2.33 U2.38 U2.39 U2.40 U2.45 U2.46 U7.0 U7.3 U7.4 USB1.0 USB1.2 USB1.3 USB1.6 USB1.7
copper on no net:
  other v1: 2335,3115

## Polygon pours and split planes (outlines as drawn)
DGND on Top Layer "Top Layer-DGND" (solid, pour order 70): 3820,4055 3840,4035 3840,3190 3845,3185 4330,3185 4330,1730 4032.32,1730 4032.32,2002.64 4029.96,2005 3204.21,2005 3204.21,1733.19 3207.36,1730.04 3207.32,1730 2045,1730 2042.5,1732.5 2050,1740 2050,4055
DGND on Top Layer "Top Layer-DGND 1" (solid, pour order 54): 1565,4070
DGND on Top Layer "Top Layer-No Net" (solid, shelved, pour order 40): 2015,4031.46 2025.07,4041.53 3906.07,4041.53 4405,3542.6 4380,3517.6 4380,1725 2050,1725 2035,1740
no net on Top Layer "NONET_L01_P010" (solid, remove dead copper, shelved, pour order 10): 2951.94,4014.29 3716.94,4014.29 3716.94,3169.29 2951.94,3169.29
no net on Top Layer "Keep-Out Layer-No Net" (solid, remove dead copper, shelved, pour order 14): 2935,4030 3715,4030 3715,3180 3710,3175 2935,3175
no net on Top Layer "Keep-Out Layer-No Net" (solid, remove dead copper, shelved, pour order 18): 2890,3980 3725,3980 3725,3095.08 2905.22,3095.08 2890.04,3080
no net on Top Layer "Keep-Out Layer-No Net" (solid, remove dead copper, shelved, pour order 22): 3690,3185 3690,3975 2945,3975 2945,3170
DGND on Bottom Layer "Bottom Layer-DGND" (solid, pour order 68): 2047.55,4055 3830,4055 3830,3190 4330,3190 4330,1730 4032.32,1730 4032.32,2000 4027.32,2005 3210,2005 3207.36,2007.64 3207.36,1730.04 2045.01,1730.04 2045,1730.05 2045,4052.45
DGND on Bottom Layer "Bottom Layer-DGND 2" (solid, pour order 62): 16040,3395
DGND on Bottom Layer "Bottom Layer-No Net" (solid, shelved, pour order 38): 2045.05,4035 2050.05,4040 3915,4040 4410,3545 4390,3525 4390,1730 2030,1730 2025,1725
DGND on Bottom Layer "Bottom Layer-No Net 1" (solid, shelved, pour order 36): 2045.05,4035 2050.05,4040 3910,4040 4400,3550 4400,1730 2035,1730 2030,1735
DGND on Bottom Layer "Bottom Layer-No Net 2" (hatched Horizontal grid 20 track 8, shelved, pour order 30): 45040,3775
DGND on Bottom Layer "Bottom Layer-DGND 1" (solid, shelved, pour order 26): 39250,4345
no net on Bottom Layer "Keep-Out Layer-No Net" (solid, remove dead copper, shelved, pour order 8): 2946.73,4015.65 3707.1,4015.65 3711.73,4010.65 3711.73,3170.65 2946.73,3170.65
no net on Bottom Layer "Keep-Out Layer-No Net" (solid, remove dead copper, shelved, pour order 12): 2935,4030 3715,4030 3715,3175 2935,3175
no net on Bottom Layer "Keep-Out Layer-No Net" (solid, remove dead copper, shelved, pour order 16): 2865,4015 3710,4015 3715,4010 3715,3115 2860,3115
no net on Bottom Layer "NONET_L02_P020" (solid, remove dead copper, shelved, pour order 20): 2945,3975 3690,3975 3690,3185 2945,3185

## Keep-outs
Keep-Out Layer:
  lines w7.5: 2045,1805 ccw(c2119.95,1805) 2119.95,1730.05 ; 2045.05,4744.46 cw(c2120,4744.46) 2120,4819.41 ; 5119.65,4819.41 cw(c5119.65,4744.46) 5194.61,4744.46 ; 5135,1730 ccw(c5135,1790) 5195,1790
  lines w7.87: 2045,1805 2045,4744.46 ; 2119.95,1730.05 2119.95,1730 3207.32,1730 ; 2120,4819.41 5119.65,4819.41 ; 3207.36,1730.04 3207.36,1925.71 ; 4032.32,1925.71 4032.32,1730 5135,1730 ; 5194.61,1790 5194.61,4744.46 ; 3830,3190 3830,3950 4480,3950 4480,3190 3830,3190
  lines w10: 3207.36,1926.42 cw(c3619.84,1926.42) 4032.32,1926.42

## Silkscreen, mask and mechanical layers (free items; w line width, h text height)
Top Overlay:
  text "AC~IN" at 4790,4740 h39.37
  text "NRST" at 2230,3925 h25 r270
  text "3V3" at 2225,3815 h25 r270
  text "CLK" at 2225,3725 h25 r270
  text "DIO" at 2220,3628.27 h25 r270
  text "GND" at 2215,3525 h25 r270
  text "TX" at 2212.32,3420 h25 r270
  text "RX" at 2210,3315 h25 r270
  text "SDA" at 2212.32,3230 h25 r270
  text "SCL" at 2212.32,3125 h25 r270
  text "3V3" at 3075,2090 h31.5 r90
  text "RX" at 3080,2000 h31.5 r90
  text "TX" at 3080,1895 h31.5 r90
  text "AC~OUT" at 4950,1785 h39.37
  text "GND" at 3080,1770 h31.5 r90
Bottom Overlay:
  text "wang.david.wei@scu.iot.lab" at 3845,4685 h60
  text "powerblade plus v3.0 2019.04.12" at 4475,4540 h60